# EAGLE board ttl (EAGLE 5.01)

Size 177.78 x 275.26 mm. Coordinates in mm from the lower left corner, seen from the top.
Outline: 0,0 177.78,0 177.78,275.26 0,275.26 0,0
Copper layers (1*16): Top 0.035mm / dielectric 1.5mm / Bottom 0.035mm
Design rules "default *": minimum track width 30mil, minimum drill 24mil, track to track 8mil, track to pad 8mil, pad to pad 8mil, via to via 8mil, smd to smd 8mil, copper to edge 40mil, drill to drill 8mil, minimum pad ring 10mil, minimum via ring 8mil, stop-mask expansion 4mil, vias tented up to drill 0mil, thermal gap 10mil

## Footprints (pad centres in the part's own frame; a part is rotated, then mirrored left to right if it is on the bottom)
0207/10 = drill 0.813 octagon: 1 -5.08,0; 2 5.08,0
70553-06 = drill 1.092 long: 1 -6.35,-7.62; 2 -3.81,-7.62; 3 -1.27,-7.62; 4 1.27,-7.62; 5 3.81,-7.62; 6 6.35,-7.62
DIL14 = drill 0.813 long: 1 -7.62,-3.81; 2 -5.08,-3.81; 3 -2.54,-3.81; 4 0,-3.81; 5 2.54,-3.81; 6 5.08,-3.81; 7 7.62,-3.81; 8 7.62,3.81; 9 5.08,3.81; 10 2.54,3.81; 11 0,3.81; 12 -2.54,3.81; 13 -5.08,3.81; 14 -7.62,3.81

## Placement (x,y rotation side)
E$1  [0207/10]  64.13,29.68 0 top
E$2  [0207/10]  64.13,32.22 0 top
E$3  [0207/10]  64.13,34.76 0 top
E$4  [0207/10]  64.13,37.3 0 top
E$5  [0207/10]  64.13,50 0 top
E$6  [0207/10]  64.13,52.54 0 top
E$7  [0207/10]  64.13,55.08 0 top
E$8  [0207/10]  64.13,57.62 0 top
E$9  [0207/10]  64.13,60.16 0 top
E$10  [0207/10]  64.13,62.7 0 top
E$11  [0207/10]  64.13,65.24 0 top
E$12  [0207/10]  64.13,67.78 0 top
E$13  [0207/10]  64.13,80.48 0 top
E$14  [0207/10]  64.13,83.02 0 top
E$15  [0207/10]  64.13,85.56 0 top
E$16  [0207/10]  64.13,88.1 0 top
E$17  [0207/10]  64.13,90.64 0 top
E$18  [0207/10]  64.13,93.18 0 top
E$19  [0207/10]  64.13,95.72 0 top
E$20  [0207/10]  64.13,98.26 0 top
E$21  [0207/10]  64.13,110.96 0 top
E$22  [0207/10]  64.13,113.5 0 top
E$23  [0207/10]  64.13,116.04 0 top
E$24  [0207/10]  64.13,118.58 0 top
E$25  [0207/10]  64.13,121.12 0 top
E$26  [0207/10]  64.13,123.66 0 top
E$27  [0207/10]  64.13,126.2 0 top
E$28  [0207/10]  64.13,128.74 0 top
E$29  [0207/10]  64.13,141.44 0 top
E$30  [0207/10]  64.13,143.98 0 top
E$31  [70553-06]  88.26,133.82 270 top
E$37  [70553-06]  88.26,113.5 270 top
E$38  [70553-06]  88.26,93.18 270 top
E$39  [70553-06]  88.26,72.86 270 top
E$40  [70553-06]  88.26,52.54 270 top
E$41  [70553-06]  88.26,32.22 270 top
V1  74164N  [DIL14]  36.19,135.09 0 top
V2  74164N  [DIL14]  37.46,104.61 0 top
V3  74164N  [DIL14]  37.46,74.13 0 top
V4  74164N  [DIL14]  37.46,43.65 0 top

## Library data of the parts
E$1-E$30 = resistor
E$31 E$37-E$41 = con-molex
V1-V4 = 74ttl-din

## Nets
+UB: V1.14
+UB1: V2.14
+UB2: V3.14
+UB3: V4.14
-UB: V1.7
-UB1: V2.7
-UB2: V3.7
-UB3: V4.7
S$1: E$1.2 E$41.6
S$2: E$2.2 E$41.5
S$3: E$3.2 E$41.4
S$4: E$4.2 E$41.3
S$5: E$5.2 E$41.2
S$6: E$6.2 E$40.6
S$7: E$7.2 E$40.5
S$8: E$8.2 E$40.4
S$9: E$9.2 E$40.3
S$10: E$10.2 E$40.2
S$11: E$11.2 E$39.6
S$12: E$12.2 E$39.5
S$13: E$13.2 E$39.4
S$14: E$14.2 E$39.3
S$15: E$15.2 E$39.2
S$16: E$16.2 E$38.6
S$17: E$17.2 E$38.5
S$18: E$18.2 E$38.4
S$19: E$19.2 E$38.3
S$20: E$20.2 E$38.2
S$21: E$21.2 E$37.6
S$22: E$22.2 E$37.5
S$23: E$23.2 E$37.4
S$24: E$24.2 E$37.3
S$25: E$25.2 E$37.2
S$27: E$1.1 V4.3
S$28: E$2.1 V4.4
S$29: E$3.1 V4.5
S$30: E$4.1 V4.6
S$31: E$5.1 V4.10
S$32: E$6.1 V4.11
S$33: E$7.1 V4.12
S$34: E$8.1 V4.13
S$35: E$9.1 V3.3
S$36: E$10.1 V3.4
S$37: E$11.1 V3.5
S$38: E$12.1 V3.6
S$39: E$13.1 V3.10
S$40: E$14.1 V3.11
S$41: E$15.1 V3.12
S$42: E$16.1 V3.13
S$43: E$17.1 V2.3
S$44: E$18.1 V2.4
S$45: E$19.1 V2.5
S$46: E$20.1 V2.6
S$47: E$21.1 V2.10
S$48: E$22.1 V2.11
S$49: E$23.1 V2.12
S$50: E$24.1 V2.13
S$51: E$25.1 V1.3
S$52: E$26.1 V1.4
S$53: E$27.1 V1.5
S$54: E$28.1 V1.6
S$55: E$26.2 E$31.6
S$56: E$27.2 E$31.5
S$57: E$28.2 E$31.4
S$58: E$29.2 E$31.3
S$59: E$30.2 E$31.2
S$60: E$29.1 V1.10
S$61: E$30.1 V1.11

## Tracks (layer width: path | path; a pad name or v marks a point on that pad's centre or on a via)
S$1  (1 unrouted)
S$2  (1 unrouted)
S$3  (1 unrouted)
S$4  (1 unrouted)
S$5  (1 unrouted)
S$6  (1 unrouted)
S$7  (1 unrouted)
S$8  (1 unrouted)
S$9  (1 unrouted)
S$10  (1 unrouted)
S$11  (1 unrouted)
S$12  (1 unrouted)
S$13  (1 unrouted)
S$14  (1 unrouted)
S$15  (1 unrouted)
S$16  (1 unrouted)
S$17  (1 unrouted)
S$18  (1 unrouted)
S$19  (1 unrouted)
S$20  (1 unrouted)
S$21  (1 unrouted)
S$22  (1 unrouted)
S$23  (1 unrouted)
S$24  (1 unrouted)
S$25  (1 unrouted)
S$27  (1 unrouted)
S$28  (1 unrouted)
S$29  (1 unrouted)
S$30  (1 unrouted)
S$31  (1 unrouted)
S$32  (1 unrouted)
S$33  (1 unrouted)
S$34  (1 unrouted)
S$35  (1 unrouted)
S$36  (1 unrouted)
S$37  (1 unrouted)
S$38  (1 unrouted)
S$39  (1 unrouted)
S$40  (1 unrouted)
S$41  (1 unrouted)
S$42  (1 unrouted)
S$43  (1 unrouted)
S$44  (1 unrouted)
S$45  (1 unrouted)
S$46  (1 unrouted)
S$47  (1 unrouted)
S$48  (1 unrouted)
S$49  (1 unrouted)
S$50  (1 unrouted)
S$51  (1 unrouted)
S$52  (1 unrouted)
S$53  (1 unrouted)
S$54  (1 unrouted)
S$55  (1 unrouted)
S$56  (1 unrouted)
S$57  (1 unrouted)
S$58  (1 unrouted)
S$59  (1 unrouted)
S$60  (1 unrouted)
S$61  (1 unrouted)